# Altium PCB RelayBoard.PcbDoc
Units mm, origin at the board's own origin, x right, y up, seen from the top; angles counter-clockwise.
Board outline 158 x 77 mm, 2 copper layers (Top Layer, Bottom Layer), stack 1.571 mm thick; 98 components, 76 nets, 303 pads, 50 vias.
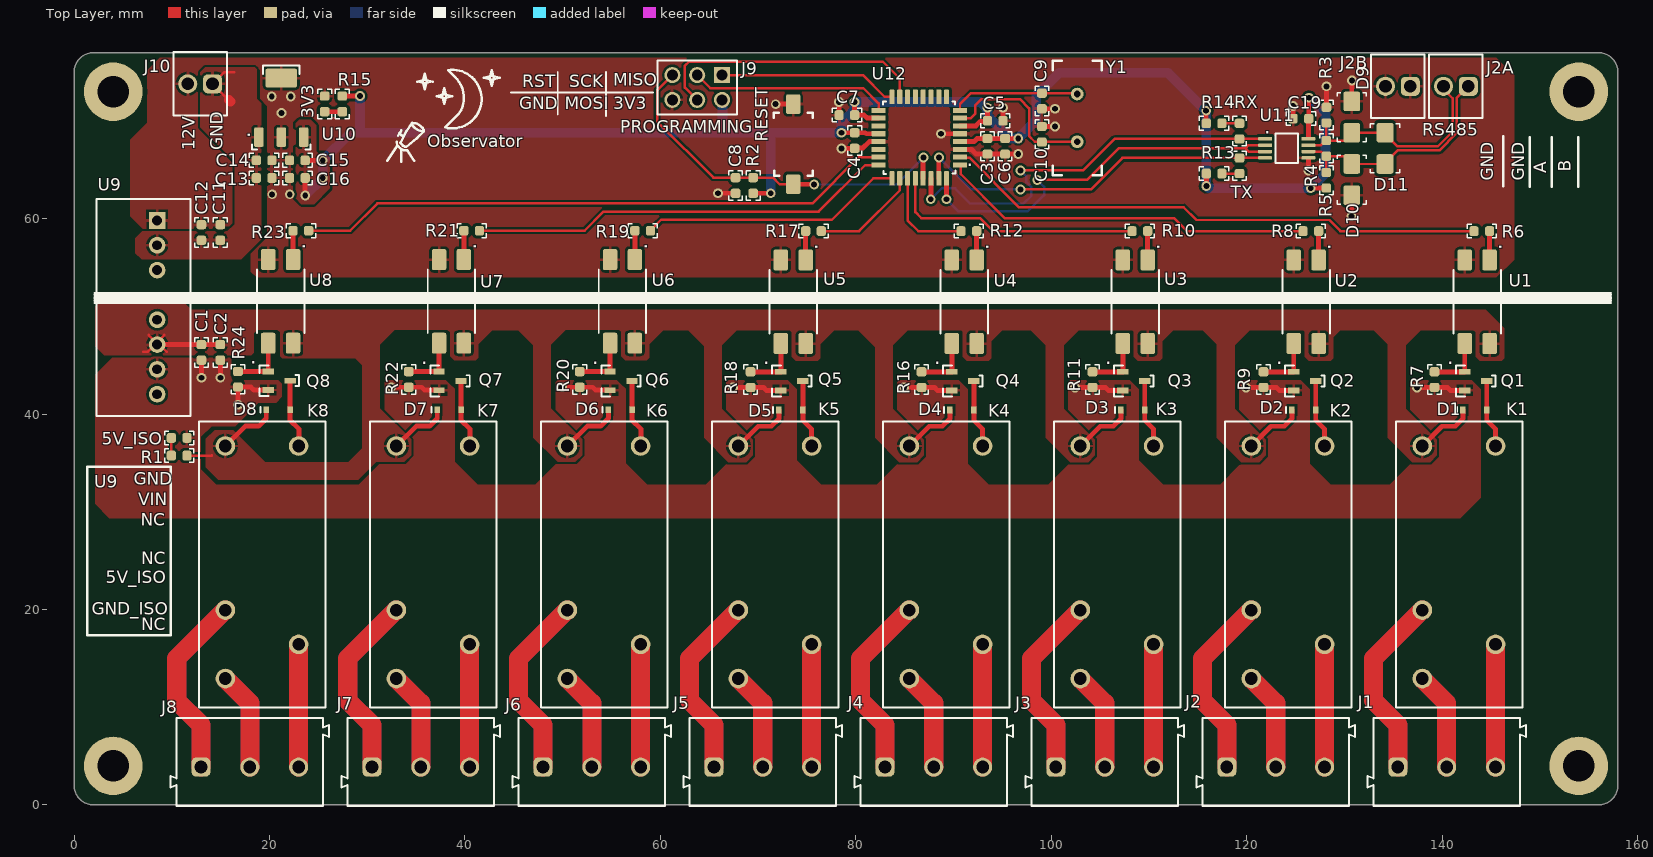
[diagram p0: Top Layer view]
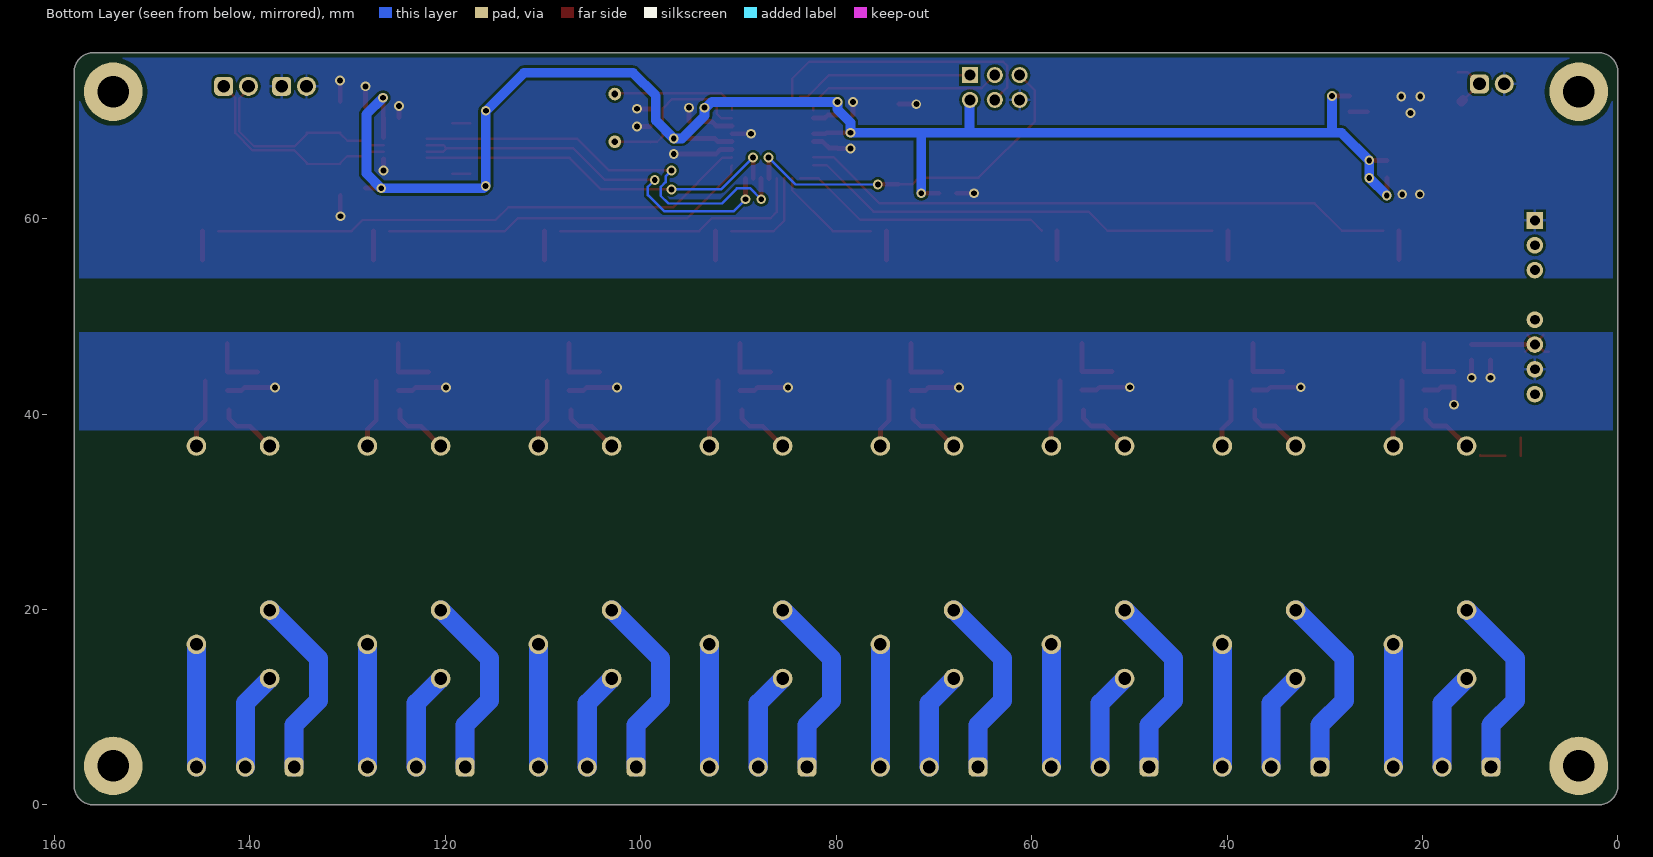
[diagram p1: Bottom Layer view, seen from below]
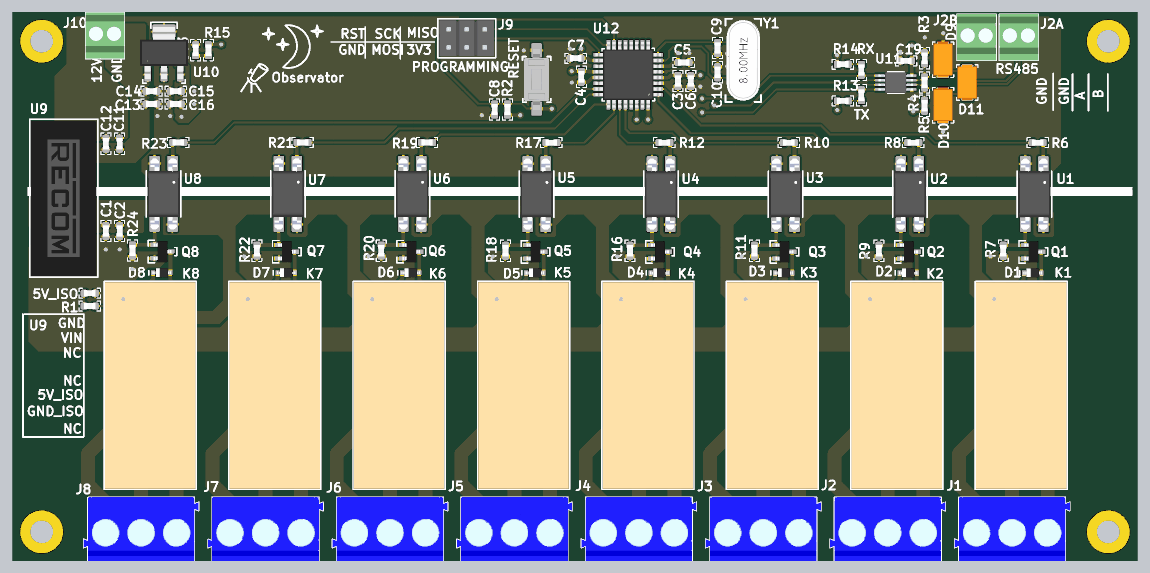
[diagram p2: 3D render of the assembled board from above, using the file's embedded part models]

## Layer stack, top to bottom
Top Solder: solder mask 0.0102, Solder Resist, Dk 3.5
Top Layer: signal copper 0.0356
Dielectric 1: dielectric 1.5, FR-4, Dk 4.8
Bottom Layer: signal copper 0.0356
Bottom Solder: solder mask 0.0102, Solder Resist, Dk 3.5

## Board outline
0,2 0,75 cw(c2,75) 2,77 156,77 cw(c156,75) 158,75 158,2 cw(c156,2) 156,0 2,0 cw(c2,2)

## Design rules (kind name [scope] priority, off if disabled: settings)
BoardOutlineClearance [All] p1: gap=0.5 ignorepadtopadclearanceinfootprint=FALSE
Clearance Clearance_PH [InNetClass('PHASE')] p1: gap=3 ignorepadtopadclearanceinfootprint=FALSE
Clearance Clearance_MH [InPadClass('MH')] p2: gap=0.5 ignorepadtopadclearanceinfootprint=FALSE
Clearance [All] p3: gap=0.25 ignorepadtopadclearanceinfootprint=FALSE except(0.15: Arc-Arc Arc-Track Arc-SMDPad Track-Track Track-SMDPad SMDPad-SMDPad SMDPad-THPad SMDPad-Via SMDPad-Hole; 0.3: SMDPad-Fill SMDPad-Poly SMDPad-Region)
HoleSize [All] p1: absolutevalues=TRUE maxlimit=3.2 minlimit=0.025 maxpercent=80.000 minpercent=20.000
HoleToHoleClearance [All] p1: gap=0.75 allowstackedmicrovias=TRUE
MinimumSolderMaskSliver [All] p1: minsoldermaskwidth=0.076
PolygonConnect [All] p1: thpad.connectstyle=Relief thpad.reliefconductorwidth=0.3 thpad.reliefentries=4 thpad.polygonreliefangle="90 Angle" thpad.airgapwidth=0.254 smdpad.connectstyle=Relief smdpad.reliefconductorwidth=0.3 smdpad.reliefentries=4 smdpad.polygonreliefangle="90 Angle" smdpad.airgapwidth=0.254 via.connectstyle=Direct via.reliefconductorwidth=0.3 via.reliefentries=4 via.polygonreliefangle="90 Angle" via.airgapwidth=0.254
RoutingVias [All] p1: holewidth=3 width=7 viastyle="Through Hole" minholewidth=0.5 minwidth=1 maxholewidth=0.711 maxwidth=1.27
SilkToSilkClearance [All] p1: silktosilkclearance=0.01
SilkToSolderMaskClearance [IsPad] p1: minsilkscreentomaskgap=0.01 clearancetoexposedcopper=FALSE
SolderMaskExpansion [All] p1: expansion=0.102 istentingtop=FALSE
Width [All] p1: maxlimit=1.95 minlimit=0.254 preferedwidth=0.5 minimp=50.000000 maximp=50.000000 favimp=50.000000
25 further rules are at their usual default settings.

## Classes and differential pairs
net class PHASE: PH1_1 PH1_2 PH1_3 PH2_1 PH2_2 PH2_3 PH3_1 PH3_2 PH3_3 PH4_1 PH4_2 PH4_3 PH5_1 PH5_2 PH5_3 PH6_1 PH6_2 PH6_3 PH7_1 PH7_2 PH7_3 PH8_1 PH8_2 PH8_3
pad class MH: Free-MH

## Components (designator, comment, footprint, x,y, rotation, side; value= is the part's Value field where it differs from the comment)
3V3 "TBD" CASE0603 25.643,71.75 r90 top
5V_ISO "TBD" CASE0603 10.752,37.565 r0 top
C1 "100nF" CASE0603 13.024,46.321 r90 top
C2 "10uF" CASE0603 14.964,46.321 r90 top
C3 "100nF" CASE0603 93.476,67.412 r90 top
C4 "100nF" CASE0603 79.888,67.999 r90 top
C5 "100nF" CASE0603 94.276,70.019 r180 top
C6 "10uF" CASE0603 95.28,67.412 r90 top
C7 "100nF" CASE0603 79.088,70.604 r0 top
C8 "100nF" CASE0603 67.696,63.4 r270 top
C9 "100nF" CASE0603 99.053,72.048 r90 top
C10 "100nF" CASE0603 99.053,68.643 r270 top
C11 "10uF" CASE0603 14.964,58.595 r270 top
C12 "100nF" CASE0603 13.024,58.595 r270 top
C13 "10uF" CASE0603 19.445,64.17 r180 top
C14 "100nF" CASE0603 19.445,65.975 r180 top
C15 "100nF" CASE0603 22.849,65.975 r0 top
C16 "10uF" CASE0603 22.849,64.17 r0 top
C19 "100nF" CASE0603 125.559,70.241 r180 top
D1 "1N4148" SOD-323 143.361,40.427 r0 top
D2 "1N4148" SOD-323 125.861,40.427 r0 top
D3 "1N4148" SOD-323 108.361,40.427 r0 top
D4 "1N4148" SOD-323 90.861,40.427 r0 top
D5 "1N4148" SOD-323 73.361,40.427 r0 top
D6 "1N4148" SOD-323 55.88,40.446 r0 top
D7 "1N4148" SOD-323 38.38,40.446 r0 top
D8 "1N4148" SOD-323 20.88,40.446 r0 top
D9 "SMAJ5.0CA" SMA 130.767,70.4 r270 top
D10 "SMAJ5.0CA" SMA 130.767,64 r270 top
D11 "SMAJ5.0CA" SMA 134.172,67.2 r90 top
J1 "691101710003" 691101710003 135.481,3.876 r0 top
J2 "691101710003" 691101710003 117.981,3.876 r0 top
J2A "691210910002" 691210910002 141.419,73.551 r180 top
J2B "691210910002" 691210910002 135.485,73.551 r180 top
J3 "691101710003" 691101710003 100.481,3.876 r0 top
J4 "691101710003" 691101710003 82.981,3.876 r0 top
J5 "691101710003" 691101710003 65.481,3.876 r0 top
J6 "691101710003" 691101710003 47.981,3.876 r0 top
J7 "691101710003" 691101710003 30.481,3.876 r0 top
J8 "691101710003" 691101710003 12.981,3.876 r0 top
J9 "PH2-06-UA" Header_2x3_2.54_Male 66.313,74.7 r180 top
J10 "691210910002" 691210910002 12.9,73.8 r180 top
K1 "RT174005" RELAY-SPDT_3.5mm 137.981,36.738 r0 top
K2 "RT174005" RELAY-SPDT_3.5mm 120.481,36.738 r0 top
K3 "RT174005" RELAY-SPDT_3.5mm 102.981,36.738 r0 top
K4 "RT174005" RELAY-SPDT_3.5mm 85.481,36.738 r0 top
K5 "RT174005" RELAY-SPDT_3.5mm 67.981,36.738 r0 top
K6 "RT174005" RELAY-SPDT_3.5mm 50.481,36.738 r0 top
K7 "RT174005" RELAY-SPDT_3.5mm 32.981,36.738 r0 top
K8 "RT174005" RELAY-SPDT_3.5mm 15.481,36.738 r0 top
Q1 "2N7002" SOT23-3 145.471,42.752 r0 top
Q2 "2N7002" SOT23-3 127.971,42.752 r0 top
Q3 "2N7002" SOT23-3 110.471,42.752 r0 top
Q4 "2N7002" SOT23-3 92.971,42.752 r0 top
Q5 "2N7002" SOT23-3 75.471,42.752 r0 top
Q6 "2N7002" SOT23-3 57.99,42.771 r0 top
Q7 "2N7002" SOT23-3 40.49,42.771 r0 top
Q8 "2N7002" SOT23-3 23.008,42.789 r0 top
R1 "10K" CASE0603 10.752,35.761 r180 top
R2 "10K" CASE0603 69.5,63.4 r90 top
R3 "10K" CASE0603 128.168,70.607 r270 top
R4 "10K" CASE0603 128.163,67.202 r270 top
R5 "10K" CASE0603 128.163,63.934 r270 top
R6 "10K" CASE0603 144.071,58.735 r0 top
R7 "10K" CASE0603 139.232,43.531 r90 top
R8 "10K" CASE0603 126.571,58.735 r0 top
R9 "10K" CASE0603 121.732,43.531 r90 top
R10 "10K" CASE0603 109.071,58.735 r0 top
R11 "10K" CASE0603 104.232,43.531 r90 top
R12 "10K" CASE0603 91.571,58.735 r0 top
R13 "10K" CASE0603 116.672,64.621 r0 top
R14 "10K" CASE0603 116.672,69.761 r0 top
R15 "10K" CASE0603 27.447,71.75 r270 top
R16 "10K" CASE0603 86.732,43.531 r90 top
R17 "10K" CASE0603 75.671,58.735 r180 top
R18 "10K" CASE0603 69.232,43.531 r90 top
R19 "10K" CASE0603 58.19,58.772 r180 top
R20 "10K" CASE0603 51.751,43.55 r90 top
R21 "10K" CASE0603 40.69,58.772 r180 top
R22 "10K" CASE0603 34.251,43.549 r90 top
R23 "10K" CASE0603 23.207,58.772 r180 top
R24 "10K" CASE0603 16.769,43.567 r90 top
RESET "PTS636 SL43 SMTR LFS" "SMT Button" 73.601,67.626 r90 top
RX "TBD" CASE0603 119.276,68.961 r270 top
TX "TBD" CASE0603 119.276,65.421 r90 top
U1 "PC817XNNIP1B" SMD-4 143.601,51.498 r270 top
U2 "PC817XNNIP1B" SMD-4 126.101,51.498 r270 top
U3 "PC817XNNIP1B" SMD-4 108.601,51.498 r270 top
U4 "PC817XNNIP1B" SMD-4 91.101,51.498 r270 top
U5 "PC817XNNIP1B" SMD-4 73.601,51.498 r270 top
U6 "PC817XNNIP1B" SMD-4 56.12,51.535 r270 top
U7 "PC817XNNIP1B" SMD-4 38.62,51.535 r270 top
U8 "PC817XNNIP1B" SMD-4 21.137,51.535 r270 top
U9 "RS3E-1205S/H3" SIP-8 8.495,59.821 r270 top
U10 "MCP1703T-3302E/MB" SOT-223-3 21.2,71.365 r90 top
U11 "MAX3471CUA+" TSSOP-8 124.108,67.2 r0 top
U12 "ATMEGA328P-AU" TQFP-32 86.498,68.296 r180 top
Y1 "AS-16.000-18" HC-49/US 102.661,70.317 r90 top

## Footprints (in the part's own frame and the unit in brackets; to place one, negate y for a bottom-side part, rotate by r counter-clockwise, add the part's x,y. Pads: shape width x height; smd on the part's side, far side on the other; paste and mask are expansions set on the pad)
691101710003 [mm] "5,00mm - modular - blue - Horizontal entry with pressure clamp - 12,6mm height - 03p"
  rrect50% 1.95x1.95 hole 1.3: 1(0,0)
  round 1.95 hole 1.3: 2(5,0) 3(10,0)
  silkscreen extent -3.1,-4 13.1,5, body extent -3.1,-4 13.1,5, height 12.65
691210910002 [mm] "2,54mm - modular - green - Horizontal wire entry - Cage clamp - 0,8mm2 wires - 02p"
  rrect50% 1.95x1.95 hole 1.3: 1(-1.27,0)
  round 1.95 hole 1.3: 2(1.27,0)
  silkscreen extent -2.74,-3.25 2.74,3.25, body extent -2.74,-3.25 2.74,3.25, height 8.55
CASE0603 [mm]
  rrect50% 0.95x1 smd: 1(-0.8,0) 2(0.8,0)
  silkscreen extent -1.5,-0.7 1.5,0.7, body extent -0.8,-0.43 0.8,0.43, height 0.85
HC-49/US [mm] "Crystal, Thru-Hole; 2 Leads"
  round 1.3 hole 0.7: 1(-2.44,0) 2(2.44,0)
  silkscreen extent -5.85,-2.5 5.85,2.5, body extent -5.67,-2.33 5.67,2.33, height 3.61
Header_2x3_2.54_Male [mm]
  rect 1.65x1.65 hole 1.1: 1(0,0)
  round 1.65 hole 1.1: 2(0,2.54) 3(2.54,0) 4(2.54,2.54) 5(5.08,0) 6(5.08,2.54)
  silkscreen extent -1.52,-1.48 6.6,4.02, body extent -1.27,-1.23 6.35,3.77, height 9.01
RELAY-SPDT_3.5mm [mm]
  round 2.007 hole 1.3: 11(7.5,-20.3) 12(0,-16.8) 14(0,-23.8) A1(0,0) A2(7.5,0)
  silkscreen extent -2.7,-26.77 10.26,2.49, body extent -2.57,-26.64 10.13,2.36, height 15.7
SIP-8 [mm]
  rect 1.7x1.7 hole 1: 1(0,0)
  round 1.7 hole 1: 2(2.54,0) 3(5.08,0) 5(10.16,0) 6(12.7,0) 7(15.24,0) 8(17.78,0)
  silkscreen extent -2.2,-6.2 20,3.4, body extent -2,-6 19.8,3.2, height 11.1
SMA [mm] "Resistor CASE 1206"
  rrect25% 2x1.72 smd mask+0.102: 1(-1.6,0) 2(1.6,0)
  silkscreen extent -2.5,-1.5 2.5,1.5, body extent -2.54,-1.35 2.51,1.35, height 2.17
SMD-4 [mm]
  rrect25% 2.15x1.48 smd: 1(-4.28,1.27) 2(-4.28,-1.27) 3(4.28,-1.27) 4(4.28,1.27)
  silkscreen extent -3.25,-2.43 3.25,2.43, body extent -5,-2.29 5,2.29, height 4
"SMT Button" [mm] "Button"
  rrect25% 2x1.5 smd: 1(-4.1,0) 2(4.1,0)
  silkscreen extent -3.21,-2 3.21,1.98, body extent -4.3,-1.75 4.3,1.75, height 4.3
SOD-323 [mm]
  rect 0.56x0.69 smd: A(1.22,0) K(-1.22,0)
  silkscreen extent -1.82,-0.3 -1.82,0.3, body extent -1.3,-0.67 1.3,0.68, height 1.1
SOT23-3 [mm]
  rect 1.15x0.6 smd: 1(-3.14,1.579) 2(-3.14,-0.321) 3(-0.89,0.629)
  silkscreen extent -4.03,-0.95 0,2.21, body extent -3.27,-0.87 -0.77,2.13, height 1.1
SOT-223-3 [mm]
  rrect25% 1.97x0.95 smd: 1(-3.025,2.3) 2(-3.025,0) 3(-3.025,-2.3)
  rrect25% 1.97x3.25 smd: 4(3.025,0)
  silkscreen extent -4.26,-3 4.3,3, body extent -3.65,-3.35 3.65,3.35, height 1.8
TQFP-32 [mm]
  rrect25% 1.47x0.52 smd: 1(-4.17,2.8) 2(-4.17,2) 3(-4.17,1.2) 4(-4.17,0.4) 5(-4.17,-0.4) 6(-4.17,-1.2) 7(-4.17,-2) 8(-4.17,-2.8) 17(4.17,-2.8) 18(4.17,-2) 19(4.17,-1.2) 20(4.17,-0.4) 21(4.17,0.4) 22(4.17,1.2) 23(4.17,2) 24(4.17,2.8)
  rrect25% 0.52x1.47 smd: 9(-2.8,-4.17) 10(-2,-4.17) 11(-1.2,-4.17) 12(-0.4,-4.17) 13(0.4,-4.17) 14(1.2,-4.17) 15(2,-4.17) 16(2.8,-4.17) 25(2.8,4.17) 26(2,4.17) 27(1.2,4.17) 28(0.4,4.17) 29(-0.4,4.17) 30(-1.2,4.17) 31(-2,4.17) 32(-2.8,4.17)
  silkscreen extent -3.7,-3.7 3.7,3.7, body extent -4.62,-4.62 4.62,4.62, height 1.2
TSSOP-8 [mm]
  rrect50% 1.425x0.36 smd: 1(-2.212,0.975) 2(-2.212,0.325) 3(-2.212,-0.325) 4(-2.212,-0.975) 5(2.212,-0.975) 6(2.212,-0.325) 7(2.212,0.325) 8(2.212,0.975)
  silkscreen extent -1.15,-1.5 1.15,1.5, body extent -2.45,-1.5 2.45,1.5, height 1.1

## Part data
3V3 5V_ISO RX TX: library part LED, "Typical INFRARED GaAs LED"
C1 C3 C4 C5 C7 C8 C9 C10 C12 C14 C15 C19: library part Capacitor_100nF, "CAP CER 100nF 5% 25V X7R 0603", MFR=KEMET, MFR PN=C0603C104J3RAC, Datasheet=https://eu.mouser.com/ProductDetail/KEMET/C0603C104J3RAC?qs=zlI8QACJnq%252BcGF637t1xBQ%3D%3D, Supplier=Mouser, Supplier PN=80-C0603C104J3RAC
C2 C6 C11 C13 C16: library part Capacitor_10uF, "CAP CER 10uF 20% 25V X5R 0603", MFR=TDK, MFR PN=C1608X5R1E106M080AC, Datasheet=https://eu.mouser.com/ProductDetail/TDK/C1608X5R1E106M080AC?qs=dfay7wIA1uGdHfZTkqsICA%3D%3D, Supplier=Mouser, Supplier PN=810-C1608X5R1E106M
D1 D2 D3 D4 D5 D6 D7 D8: library part "Diode 1N4148", "High Conductance Fast Diode", MFR="Micro Commercial Components (MCC)", MFR PN=1N4148WX-TP, ComponentLink1Description="Manufacturer Link", ComponentLink1URL=http://www.fairchildsemi.com/, ComponentLink2Description=Datasheet, ComponentLink2URL=http://www.fairchildsemi.com/ds/1N%2F1N4148.pdf, Datasheet=https://eu.mouser.com/ProductDetail/Micro-Commercial-Components-MCC/1N4148WX-TP?qs=Vo7e0yZOYdH7fKyVBspYOg%3D%3D, Supplier=Mouser, Supplier PN=833-1N4148WX-TP
D9 D10 D11: library part Diode_SMAJ5.0CA, "9.2V Clamp 43.5A Ipp Tvs Diode Surface Mount DO-214AC (SMA)", MFR="Good-Ark Semiconductor", Datasheet=https://www.digikey.ro/en/products/detail/good-ark-semiconductor/SMAJ5-0CA/18649098, MFR PN=SMAJ5.0CA, Supplier="Digi Key", Supplier PN=4786-SMAJ5.0CACT-ND
J1 J2 J3 J4 J5 J6 J7 J8: library part Connector_691101710003, "TERM BLOCK 3P HORIZON 5MM PCB", MFR=Wurth, Datasheet=https://www.digikey.ro/en/products/detail/w%C3%BCrth-elektronik/691210910002/10668428?s=N4IgTCBcDaIGwE4CMYkAZlqxAugXyA, MFR PN=691101710003, Supplier="Digi Key", Supplier PN=732-2027-ND
J2A J2B J10: library part Connector_691210910002, "TERM BLOCK 2P HORIZON 2.54MM PCB", MFR=Wurth, Datasheet=https://www.digikey.ro/en/products/detail/w%C3%BCrth-elektronik/691210910002/10668428?s=N4IgTCBcDaIGwE4CMYkAZlqxAugXyA, MFR PN=691210910002, Supplier="Digi Key", Supplier PN=732-691210910002-ND
J9: library part Connector_PH2-06-UA, "Connector Header Through Hole 6 position 0.100\" (2.54mm)", MFR="Adam Tech", Datasheet=https://www.digikey.ro/en/products/detail/adam-tech/PH2-06-UA/9830396, MFR PN=PH2-06-UA, Supplier="Digi Key", Supplier PN=2057-PH2-06-UA-ND
K1 K2 K3 K4 K5 K6 K7 K8: library part Relay_RT174005, "RELAY GEN PURPOSE SPDT 10A 5V", MFR=TE
Q1 Q2 Q3 Q4 Q5 Q6 Q7 Q8: library part Transistor_NMOS, "MOSFET N-CH 60V 280MA SOT23-3", MFR=Microchip, MFR PN=2N7002-G, Datasheetr=https://eu.mouser.com/ProductDetail/Microchip-Technology/2N7002-G?qs=D%2FHwGy7fPj%2F0m3YgJ%252BOEvg%3D%3D&gad_source=1&gclid=CjwKCAiA-vOsBhAAEiwAIWR0TUe7q_QostOicZHu1AHXgQXTk64doIjIByY-NhPhM9vjgvrvT5qG4BoC-HkQAvD_BwE&_gl=1*1hvi63b*_ga*MjAyNjQwOTA4MS4xNzA0NjI4Mjkx*_ga_15W4STQT4T*MTcwNDgyMjg3Ni4yLjEuMTcwNDgyMjg3Ni42MC4wLjA., Supplier=689-2N7002-G, Supplier PN=689-2N7002-G
R1 R2 R3 R4 R5 R6 R7 R8 R9 R10 R11 R12 R13 R14 R15 R16 R17 R18 R19 R20 R21 R22 R23 R24: library part Resistor_10K_0603, "RES 10K 1% 1/10W 0603", MFR=YAGEO, MFR PN=RC0603FR-0710KL, Datasheet=https://eu.mouser.com/ProductDetail/YAGEO/RC0603FR-0710KL?qs=grNVn54RoB%252B3GtjbJj3wJQ%3D%3D, Supplier=Mouser, Supplier PN=603-RC0603FR-0710KL
RESET: library part "Button_PTS636 SL43 SMTR LFS", "9.2V Clamp 43.5A Ipp Tvs Diode Surface Mount DO-214AC (SMA)", MFR=C&K, Datasheet=https://www.digikey.ro/en/products/detail/c-k/PTS636-SL43-SMTR-LFS/10071722, MFR PN="PTS636 SL43 SMTR LFS", Supplier="Digi Key", Supplier PN=CKN12309-1-ND
U1 U2 U3 U4 U5 U6 U7 U8: library part Optocoupler_PC817, "4-Pin Phototransistor Optocoupler", MFR="Sharp Microelectronics", Datasheet=https://eu.mouser.com/ProductDetail/Sharp-Microelectronics/PC817XNNIP1B?qs=rrS6PyfT74dJvnx7366b6Q%3D%3D, MFR PN=PC817XNNIP1B, Supplier=852-PC817XNNIP1B, Supplier PN=Mouser
U9: library part Module_RS3E-1205S/H3, "DC DC CONVERTER 9-18V IN 5V OUT 600mA 3W"
U10: "IC REG LINEAR 3.3V 250MA SOT89-3", MFR=Microchip, Datasheet=https://www.digikey.ro/en/products/detail/microchip-technology/MCP1703T-3302E-MB/1635604, MFR PN=MCP1703T-3302E/MB, Supplier="Digi Key", Supplier PN=MCP1703T-3302E/MBCT-ND
U11: library part IC_MAX3471, "IC TRANSCEIVER HALF 1/1 8UMAX", MFR="Analog Devices", Datasheet=https://www.digikey.com/en/products/detail/analog-devices-inc-maxim-integrated/max3471cua/1702211, MFR PN=MAX3471CUA+, Supplier="Digi Key", Supplier PN=MAX3471CUA+-ND
U12: library part IC_ATMEGA328, "AVR AVR® ATmega Microcontroller IC 8-Bit 20MHz 32KB (16K x 16) FLASH 32-TQFP (7x7)", MFR PN=Microchip, Datasheet=https://www.digikey.com/en/products/detail/microchip-technology/ATMEGA328P-AU/1832260, MFR=ATMEGA328P-AU, Supplier="Digi Key", Supplier PN=ATMEGA328P-AU-ND
Y1: library part Crystal_AS-16.000-18, "16 MHz ±30ppm Crystal 18pF 40 Ohms HC-49/US", MFR="Raltron Electronics", Datasheet=https://www.digikey.ro/en/products/detail/raltron-electronics/AS-16-000-18/10271769, MFR PN=AS-16.000-18, Supplier="Digi Key", Supplier PN=2151-AS-16.000-18-ND

## Free pads (board coordinates)
  round 6 hole 3.2: MH(4,4) MH(4,73) MH(154,4) MH(154,73)

## Via types
v1: diameter 1, hole 0.6, Top Layer to Bottom Layer, tented both sides, 50 vias

## Nets (pads, with @x,y where several pads share a name; then routed paths per layer and width w, separated by ;. In a path a pad name is that pad's centre, name@x,y a point inside that pad or via, vN(x,y) a via of type N, cw(c..) or ccw(c..) an arc to the next point about the centre after c; other vN are vias at no path point)
3V3: C3.2 C4.2 C5.2 C6.2 C7.2 C15.2 C16.2 C19.1 J9.2 R2.1 R5.2 R13.1 R14.1 R15.1 U10.3 U11.8 U12.4 U12.6 U12.18 U12.20 | length 182.3
  Top Layer w0.5: v1(23.649,62.37) C16.2 ; C15.2 v1(25.449,65.975) ; R15.1 v1(29.247,72.55) ; R2.1 v1(71.3,62.6) ; v1@78.54,68.799 C4.2 79.891,68.796 80.968,68.796 81.068,68.696 U12.20 ; v1@79.888,71.951 C7.2 80.861,70.604 81.158,70.306 82.318,70.306 U12.18 ; U12.4 92.098,67.896 92.413,68.212 C3.2 C6.2 v1@96.628,68.212 ; U12.6 92.298,69.496 92.769,69.967 93.424,69.967 C5.2 v1@93.476,71.367 ; R14.1@115.863,69.883 v1(115.863,71.044) ; v1(115.881,63.338) R13.1@115.881,64.499 ; C19.1@126.339,70.222 C19.1@126.352,70.234 ; U11.8@126.352,68.314 C19.1@126.352,70.234 ; C19.1@126.352,70.341 C19.1@126.352,70.234 ; v1@126.359,72.383 C19.1 C19.1@126.352,70.234 ; v1@126.573,63.134 R5.2
  Bottom Layer w1: v1(23.649,62.37) v1(25.449,64.17) v1(25.449,65.975) 28.266,68.792 29.268,68.792 ; v1(29.247,72.55) 29.268,72.529 29.268,68.792 ; J9.2 66.368,72.104 66.368,68.792 ; v1(71.3,62.6) 71.3,68.56 71.068,68.792 ; v1(126.382,72.383) 128.068,70.697 128.068,64.614 v1(126.573,63.118) 116.101,63.118 115.872,63.347 115.872,71.035 v1(115.863,71.044) 111.975,74.932 100.805,74.932 98.468,72.596 98.468,70.059 v1(96.628,68.219) 95.781,68.219 93.469,70.531 v1(93.469,71.367) 93.333,71.367 92.749,71.951 v1(79.88,71.951) 79.88,71.199 78.54,69.859 v1(78.54,68.792) 71.068,68.792 ; 29.268,68.792 66.368,68.792 ; 66.368,68.792 71.068,68.792
5V_ISO: C1.2 C2.2 D1.K D2.K D3.K D4.K D5.K D6.K D7.K D8.K K1.A1 K2.A1 K3.A1 K4.A1 K5.A1 K6.A1 K7.A1 K8.A1 R1.1 U1.4 U2.4 U3.4 U4.4 U5.4 U6.4 U7.4 U8.4 U9.6 | length 63.8
  Top Layer w0.254: 7.069,46.367 7.508,46.367 8.261,47.121 U9.6 ; 7.624,48.108 U9.6@8.378,47.354 ; U9.6@8.495,47.354 9.248,48.108 ; U9.6@8.728,47.121 9.482,46.367 ; R1.1 14.062,35.761 14.069,35.767
  Top Layer w0.5: U9.6 C1.2 C2.2 ; K8.A1 17.522,38.778 18.885,38.778 19.66,39.553 D8.K ; K7.A1 35.022,38.778 36.385,38.778 37.16,39.553 D7.K ; K6.A1 52.522,38.778 53.885,38.778 54.69,39.583 D6.K@54.69,40.416 ; K5.A1@67.962,36.719 70.003,38.759 71.366,38.759 72.141,39.534 D5.K ; K4.A1@85.462,36.719 87.503,38.759 88.866,38.759 89.641,39.534 D4.K ; K3.A1@102.962,36.719 105.003,38.759 106.366,38.759 107.141,39.534 D3.K ; K2.A1@120.462,36.719 122.503,38.759 123.866,38.759 124.641,39.534 D2.K ; K1.A1@137.962,36.719 140.003,38.759 141.366,38.759 142.141,39.534 D1.K
12V: C11.2 C12.2 C13.2 C14.2 J10.1 U9.2 U10.1 | length 5.3
  Top Layer w0.254: 15.845,72.149 15.821,72.149 J10.1 15.374,75.004 16.386,75.004
  Top Layer w1: 15.845,72.149 15.994,72 16,72
A1: D1.A K1.A2 Q1.3 | length 7
  Top Layer w0.5: Q1.3 D1.A 144.581,39.371 145.481,38.471 K1.A2
A2: D2.A K2.A2 Q2.3 | length 7
  Top Layer w0.5: Q2.3 D2.A 127.081,39.371 127.981,38.471 K2.A2
A3: D3.A K3.A2 Q3.3 | length 7
  Top Layer w0.5: Q3.3 D3.A 109.581,39.371 110.481,38.471 K3.A2
A4: D4.A K4.A2 Q4.3 | length 7
  Top Layer w0.5: Q4.3 D4.A 92.081,39.371 92.981,38.471 K4.A2
A5: D5.A K5.A2 Q5.3 | length 7
  Top Layer w0.5: Q5.3 D5.A 74.581,39.371 75.481,38.471 K5.A2
A6: D6.A K6.A2 Q6.3 | length 7
  Top Layer w0.5: Q6.3 D6.A 57.1,39.39 58,38.49 K6.A2@58,36.756
A7: D7.A K7.A2 Q7.3 | length 7
  Top Layer w0.5: Q7.3 D7.A 39.6,39.39 40.5,38.49 K7.A2@40.5,36.756
A8: D8.A K8.A2 Q8.3 | length 7
  Top Layer w0.5: Q8.3 22.109,43.409 22.109,40.455 D8.A 22.1,39.39 23,38.49 K8.A2@23,36.756
B1: R6.1 U12.2 | length 55.7
  Top Layer w0.254: U12.2 90.702,66.262 91.622,66.262 96.718,61.167 113.569,61.167 114.869,59.867 128.469,59.867 129.6,58.735 R6.1
B2: R8.1 U12.1 | length 38.4
  Top Layer w0.254: U12.1 90.668,65.441 90.746,65.363 90.746,64.562 95.24,60.067 112.569,60.067 113.9,58.735 R8.1
B3: R10.1 U12.28 | length 26.4
  Top Layer w0.254: U12.28 86.098,60.668 86.699,60.067 92.701,60.067 94.033,58.735 R10.1
B4: R12.1 U12.27 | length 10.2
  Top Layer w0.254: U12.27 85.298,59.831 86.394,58.735 R12.1
B5: R17.1 U12.26 | length 11
  Top Layer w0.254: R17.1 80.337,58.735 84.498,62.897 U12.26
B6: R19.1 U12.25 | length 26.9
  Top Layer w0.254: R19.1 58.99,58.797 60.086,59.893 77.561,59.893 81.793,64.126 U12.25
B7: R21.1 U12.24 | length 43.6
  Top Layer w0.254: R21.1 52.245,58.772 54.192,60.72 76.192,60.72 80.968,65.496 U12.24
B8: R23.1 U12.23 | length 61.4
  Top Layer w0.254: R23.1 28.245,58.772 31.039,61.567 75.569,61.567 80.298,66.296 U12.23
DIR: U11.2 U11.3 U12.32 | length 42.1
  Top Layer w0.254: v1(98.568,63.971) 103.665,63.971 106.89,67.196 119.879,67.196 ; U11.3 120.2,66.875 119.879,67.196 ; U11.2 120.208,67.525 119.879,67.196
  Top Layer w0.5: v1@89.298,61.985 U12.32
  Bottom Layer w0.254: v1(89.275,61.985) 90.482,60.777 97.628,60.777 99.268,62.418 99.268,63.271 v1(98.568,63.971)
GND: 3V3.2 C3.1 C4.1 C5.1 C6.1 C7.1 C8.2 C9.1 C10.1 C11.1 C12.1 C13.1 C14.1 C15.1 C16.1 C19.2 D9.1 D10.2 J2B.1 J2B.2 J9.6 J10.2 R3.1 RESET.2 U1.2 U2.2 U3.2 U4.2 U5.2 U6.2 U7.2 U8.2 U9.1 U10.2 U10.4 U11.5 U12.3 U12.5 U12.21 | length 29.9
  Top Layer w0.5: v1(65.896,62.6) C8.2 ; v1(71.801,71.726) RESET.2 ; C7.1 v1@78.288,71.951 ; v1@78.54,67.199 C4.1 79.932,67.244 80.74,67.244 81.383,67.886 82.318,67.886 U12.21 ; v1@88.72,68.696 U12.5 ; U12.3 90.678,67.086 91.85,67.086 92.324,66.612 C3.1 C6.1 v1@96.628,66.612 ; C5.1 v1@95.076,71.367 ; C10.1 v1@100.401,69.443 ; C9.1 v1@100.401,71.248 ; C19.2@124.75,70.363 v1(124.75,71.525) ; v1(126.329,64.942) 126.329,66.103 U11.5@126.338,66.112 ; R3.1 v1@128.168,73.548 ; v1@130.767,60.259 D10.2 ; D9.1 v1@130.767,74.141
  other v1: 130.744,60.259 20.268,62.496 22.068,62.496 96.628,66.619 78.54,67.192 88.72,68.689 100.401,69.451 21.225,70.824 100.401,71.255 95.069,71.367 78.28,71.951 20.228,72.496 22.168,72.496 128.192,73.548 130.791,74.141
GND_ISO: 5V_ISO.2 C1.1 C2.1 Q1.2 Q2.2 Q3.2 Q4.2 Q5.2 Q6.2 Q7.2 Q8.2 R7.1 R9.1 R11.1 R16.1 R18.1 R20.1 R22.1 R24.1 U9.7 | length 43.8
  Top Layer w0.5: v1(13.024,43.721) C1.1 ; v1(14.964,43.721) C2.1 ; v1(16.769,40.967) R24.1 18.09,42.767 18.389,42.468 Q8.2 ; v1(32.451,42.749) R22.1 35.572,42.749 35.871,42.45 Q7.2 ; v1(49.951,42.749) R20.1 53.072,42.749 53.371,42.45 Q6.2 ; v1(67.432,42.731) R18.1 70.553,42.731 70.853,42.431 Q5.2 ; v1(84.932,42.731) R16.1 88.053,42.731 88.353,42.431 Q4.2 ; v1(102.432,42.731) R11.1 105.553,42.731 105.853,42.431 Q3.2 ; v1(119.932,42.731) R9.1 123.053,42.731 123.353,42.431 Q2.2 ; v1(137.432,42.731) R7.1 140.553,42.731 140.853,42.431 Q1.2
Net3V3_1: 3V3.1 R15.2 | length 1.8
  Top Layer w0.5: 3V3.1 R15.2
Net5V_ISO_1: 5V_ISO.1 R1.2 | length 1.8
  Top Layer w0.254: R1.2 5V_ISO.1
NetC9_2: C9.2 U12.8 Y1.2 | length 13.1
  Top Layer w0.254: U12.8 90.668,71.737 91.779,72.848 102.57,72.848 Y1.2
NetC10_2: C10.2 U12.7 Y1.1 | length 16.8
  Top Layer w0.254: U12.7 91.784,70.296 92.21,70.722 92.21,71.594 92.86,72.244 96.788,72.244 97.748,71.284 97.748,68.453 98.321,67.88 99.017,67.88 C10.2 99.07,67.86 102.644,67.86 Y1.1
NetD9_2: D9.2 D11.2 J2A.2 R3.2 R4.1 U11.7 | length 23.5
  Top Layer w0.254: U11.7 127.601,67.525 128.078,68.002 R4.1 ; R3.2 128.166,69.804 128.166,68.005 R4.1 ; J2A.2 140.149,73.271 141.098,72.323 141.098,68.925 139.568,67.396 135.436,67.396 134.172,68.66 D11.2 D9.2 130.767,68.729 130.041,68.002 R4.1
NetD10_1: D10.1 D11.1 J2A.1 R4.2 R5.1 U11.6 | length 24.1
  Top Layer w0.254: U11.6 127.606,66.875 128.078,66.402 R4.2 ; R5.1 R4.2 ; J2A.1 141.502,72.363 141.502,68.758 139.736,66.992 135.449,66.992 134.172,65.714 D11.1 D10.1 130.767,65.676 130.041,66.402 R4.2
NetQ1_1: Q1.1 R7.2 U1.3 | length 6
  Top Layer w0.5: R7.2 Q1.1 U1.3
NetQ2_1: Q2.1 R9.2 U2.3 | length 6
  Top Layer w0.5: R9.2 Q2.1 U2.3
NetQ3_1: Q3.1 R11.2 U3.3 | length 6
  Top Layer w0.5: R11.2 Q3.1 U3.3
NetQ4_1: Q4.1 R16.2 U4.3 | length 6
  Top Layer w0.5: R16.2 Q4.1 U4.3
NetQ5_1: Q5.1 R18.2 U5.3 | length 6
  Top Layer w0.5: R18.2 72.331,44.331 U5.3
NetQ6_1: Q6.1 R20.2 U6.3 | length 6
  Top Layer w0.5: R20.2 Q6.1 U6.3@54.85,47.237
NetQ7_1: Q7.1 R22.2 U7.3 | length 6
  Top Layer w0.5: R22.2 Q7.1 U7.3@37.35,47.237
NetQ8_1: Q8.1 R24.2 U8.3 | length 6
  Top Layer w0.5: R24.2 Q8.1 U8.3@19.867,47.254
NetR6_2: R6.2 U1.1 | length 3
  Top Layer w0.5: U1.1 R6.2
NetR8_2: R8.2 U2.1 | length 3
  Top Layer w0.5: U2.1 R8.2
NetR10_2: R10.2 U3.1 | length 3
  Top Layer w0.5: U3.1 R10.2
NetR12_2: R12.2 U4.1 | length 3
  Top Layer w0.5: U4.1 R12.2
NetR13_2: R13.2 TX.1 | length 1.8
  Top Layer w0.254: R13.2 TX.1
NetR14_2: R14.2 RX.1 | length 1.8
  Top Layer w0.254: R14.2 RX.1
NetR17_2: R17.2 U5.1 | length 3
  Top Layer w0.5: U5.1 R17.2
NetR19_2: R19.2 U6.1 | length 3
  Top Layer w0.5: U6.1 R19.2
NetR21_2: R21.2 U7.1 | length 3
  Top Layer w0.5: U7.1 R21.2
NetR23_2: R23.2 U8.1 | length 3
  Top Layer w0.5: U8.1 R23.2
PDI/MOSI: J9.4 U12.15 | length 28.8
  Top Layer w0.254: J9.4 62.517,73.416 62.517,75.661 62.923,76.067 82.769,76.067 84.498,74.338 U12.15
PDO/MISO: J9.1 U12.16 | length 18.3
  Top Layer w0.254: J9.1 80.736,74.7 82.97,72.466 U12.16
PH1_1: J1.3 K1.11 | length 25.1
  Top Layer w1.95: J1.3 K1.11
  Bottom Layer w1.95: J1.3 K1.11
PH1_2: J1.2 K1.14 | length 20.2
  Top Layer w1.95: K1.14 137.981,12.922 140.481,10.422 J1.2
  Bottom Layer w1.95: K1.14 137.981,12.922 140.481,10.422 J1.2
PH1_3: J1.1 K1.12 | length 38.3
  Top Layer w1.95: J1.1 135.481,8.198 133.003,10.677 133.003,15 137.93,19.927 137.97,19.927 K1.12
  Bottom Layer w1.95: J1.1 135.481,8.198 133.003,10.677 133.003,15 137.93,19.927 137.97,19.927 K1.12
PH2_1: J2.3 K2.11 | length 25.1
  Top Layer w1.95: J2.3 K2.11
  Bottom Layer w1.95: J2.3 K2.11
PH2_2: J2.2 K2.14 | length 20.2
  Top Layer w1.95: K2.14 120.481,12.922 122.981,10.422 J2.2
  Bottom Layer w1.95: K2.14 120.481,12.922 122.981,10.422 J2.2
PH2_3: J2.1 K2.12 | length 38.3
  Top Layer w1.95: J2.1 117.981,8.198 115.503,10.677 115.503,15 120.43,19.927 120.47,19.927 K2.12
  Bottom Layer w1.95: J2.1 117.981,8.198 115.503,10.677 115.503,15 120.43,19.927 120.47,19.927 K2.12
PH3_1: J3.3 K3.11 | length 25.1
  Top Layer w1.95: J3.3 K3.11
  Bottom Layer w1.95: J3.3 K3.11
PH3_2: J3.2 K3.14 | length 20.2
  Top Layer w1.95: K3.14 102.981,12.922 105.481,10.422 J3.2
  Bottom Layer w1.95: K3.14 102.981,12.922 105.481,10.422 J3.2
PH3_3: J3.1 K3.12 | length 38.3
  Top Layer w1.95: J3.1 100.481,8.198 98.003,10.677 98.003,15 102.93,19.927 102.97,19.927 K3.12
  Bottom Layer w1.95: J3.1 100.481,8.198 98.003,10.677 98.003,15 102.93,19.927 102.97,19.927 K3.12
PH4_1: J4.3 K4.11 | length 25.1
  Top Layer w1.95: J4.3 K4.11
  Bottom Layer w1.95: J4.3 K4.11
PH4_2: J4.2 K4.14 | length 20.2
  Top Layer w1.95: K4.14 85.481,12.922 87.981,10.422 J4.2
  Bottom Layer w1.95: K4.14 85.481,12.922 87.981,10.422 J4.2
PH4_3: J4.1 K4.12 | length 38.3
  Top Layer w1.95: J4.1 82.981,8.198 80.503,10.677 80.503,15 85.43,19.927 85.47,19.927 K4.12
  Bottom Layer w1.95: J4.1 82.981,8.198 80.503,10.677 80.503,15 85.43,19.927 85.47,19.927 K4.12
PH5_1: J5.3 K5.11 | length 25.1
  Top Layer w1.95: J5.3 K5.11
  Bottom Layer w1.95: J5.3 K5.11
PH5_2: J5.2 K5.14 | length 20.2
  Top Layer w1.95: K5.14 67.981,12.922 70.481,10.422 J5.2
  Bottom Layer w1.95: K5.14 67.981,12.922 70.481,10.422 J5.2
PH5_3: J5.1 K5.12 | length 38.3
  Top Layer w1.95: J5.1 65.481,8.198 63.003,10.677 63.003,15 67.93,19.927 67.97,19.927 K5.12
  Bottom Layer w1.95: J5.1 65.481,8.198 63.003,10.677 63.003,15 67.93,19.927 67.97,19.927 K5.12
PH6_1: J6.3 K6.11 | length 25.1
  Top Layer w1.95: J6.3 K6.11
  Bottom Layer w1.95: J6.3 K6.11
PH6_2: J6.2 K6.14 | length 20.2
  Top Layer w1.95: K6.14 50.481,12.922 52.981,10.422 J6.2
  Bottom Layer w1.95: K6.14 50.481,12.922 52.981,10.422 J6.2
PH6_3: J6.1 K6.12 | length 38.3
  Top Layer w1.95: J6.1 47.981,8.198 45.503,10.677 45.503,15 50.43,19.927 50.47,19.927 K6.12
  Bottom Layer w1.95: J6.1 47.981,8.198 45.503,10.677 45.503,15 50.43,19.927 50.47,19.927 K6.12
PH7_1: J7.3 K7.11 | length 25.1
  Top Layer w1.95: J7.3 K7.11
  Bottom Layer w1.95: J7.3 K7.11
PH7_2: J7.2 K7.14 | length 20.2
  Top Layer w1.95: K7.14@32.981,12.922 35.481,10.422 J7.2
  Bottom Layer w1.95: K7.14@32.981,12.922 35.481,10.422 J7.2
PH7_3: J7.1 K7.12 | length 38.4
  Top Layer w1.95: J7.1 30.481,8.198 28.003,10.677 28.003,15.005 32.925,19.927 32.97,19.927 K7.12
  Bottom Layer w1.95: J7.1 30.481,8.198 28.003,10.677 28.003,15.015 32.915,19.927 32.97,19.927 K7.12
PH8_1: J8.3 K8.11 | length 25.1
  Top Layer w1.95: J8.3 K8.11
  Bottom Layer w1.95: J8.3 K8.11
PH8_2: J8.2 K8.14 | length 20.2
  Top Layer w1.95: K8.14 17.981,10.438 J8.2
  Bottom Layer w1.95: K8.14 17.981,10.438 J8.2
PH8_3: J8.1 K8.12 | length 38.3
  Top Layer w1.95: J8.1 12.981,8.198 10.503,10.677 10.503,15 15.43,19.927 15.47,19.927 K8.12
  Bottom Layer w1.95: J8.1 12.981,8.198 10.503,10.677 10.503,15 15.43,19.927 15.47,19.927 K8.12
R\E\S\E\T\: C8.1 J9.5 R2.2 RESET.1 U12.29 | length 38.6
  Top Layer w0.254: J9.5 59.669,73.135 59.669,69.967 65.436,64.2 C8.1 R2.2 71.53,64.2 72.204,63.526 RESET.1
  Top Layer w0.5: RESET.1 v1@75.742,63.526 ; U12.29 v1@86.898,66.268
  Bottom Layer w0.254: v1(75.742,63.502) 84.156,63.502 v1(86.922,66.268)
RX: RX.2 U11.1 U12.30 | length 43.3
  Top Layer w0.254: v1(96.868,64.936) 103.265,64.936 106.49,68.161 RX.2 119.283,68.168 121.889,68.168 U11.1
  Top Layer w0.5: v1@87.698,61.985 U12.30
  Bottom Layer w0.254: v1(87.675,61.985) 88.786,63.096 90.168,63.096 91.709,61.556 97.18,61.556 97.96,62.335 97.96,63.262 97.468,63.754 97.468,64.336 v1(96.868,64.936)
SCK: J9.3 U12.17 | length 20.5
  Top Layer w0.254: J9.3 65.106,73.367 80.769,73.367 82.328,71.808 U12.17
TX: TX.2 U11.4 U12.31 | length 38.2
  Top Layer w0.254: v1(96.868,62.996) 104.068,62.996 107.294,66.221 TX.2 119.278,66.223 121.894,66.223 U11.4
  Top Layer w0.5: U12.31 v1@88.498,66.268
  Bottom Layer w0.254: v1(88.522,66.268) 91.793,62.996 v1(96.868,62.996)
pads on no net: U9.3 U9.5 U9.8 U12.9 U12.10 U12.11 U12.12 U12.13 U12.14 U12.19 U12.22

## Polygon pours and split planes (outlines as drawn)
12V on Top Layer "12V_L01_P025" (solid, pour order 25): 13.413,75.496 18.468,75.496 18.668,75.296 18.668,72.296 19.168,71.796 19.168,57.896 17.124,55.851 6.905,55.851 6.268,56.488 6.268,57.996 6.981,58.709 15.681,58.709 16.417,59.445 16.417,65.85 12.922,69.346 12.922,75.005
GND on Top Layer "Top Layer-GND" (solid, remove dead copper, pour order 26): 19.068,75.196 19.068,72.196 19.768,71.496 19.768,58.096 18.068,56.396 18.068,54.596 18.675,53.989 145.562,53.989 147.368,55.796 147.368,74.696 145.568,76.496 11.668,76.496 8.768,76.496 7.468,75.196 7.468,69.796 5.768,68.096 5.768,60.238 7.012,58.994 15.826,58.994 16.168,59.337 16.168,65.796 13.268,68.696 13.268,75.296 13.668,75.696 18.568,75.696
3V3 on Top Layer "3V3_L01_P010" (solid, pour order 10): 22.668,69.751 23.034,70.117 24.231,70.117 24.768,69.579 24.768,66.896 24.968,66.696 25.768,66.696 26.168,66.296 26.168,63.096 24.568,61.496 23.268,61.496 22.668,62.096
GND_ISO on Top Layer "Top Layer-GND_ISO" (solid, pour order 22): 141.869,29.367 143.94,31.439 143.94,42.557 143.025,43.473 136.974,43.473 136.769,43.267 136.769,34.867 134.669,32.767 128.612,32.767 126.441,34.939 126.441,42.557 125.525,43.473 119.474,43.473 119.269,43.267 119.269,34.749 117.287,32.767 111.448,32.767 108.94,35.275 108.94,42.557 108.025,43.473 101.974,43.473 101.769,43.267 101.769,34.839 99.697,32.767 93.59,32.767 91.441,34.917 91.441,42.557 90.525,43.473 84.474,43.473 84.269,43.267 84.269,34.868 82.168,32.767 76.447,32.767 73.941,35.274 73.941,42.557 73.025,43.473 66.974,43.473 66.769,43.267 66.769,34.867 64.669,32.767 58.651,32.767 56.459,34.959 56.459,42.576 55.544,43.491 49.493,43.491 49.288,43.286 49.288,34.856 47.199,32.767 41.3,32.767 38.959,35.108 38.959,42.576 38.044,43.492 31.993,43.492 31.788,43.286 31.788,35.404 29.15,32.767 14.569,32.767 12.969,34.367 12.969,37.667 14.069,38.767 16.469,38.767 18.869,41.167 20.669,41.167 21.269,41.767 21.269,43.067 20.869,43.467 16.269,43.467 16.069,43.667 16.069,45.654 15.856,45.867 3.969,45.867 2.139,44.038 2.139,30.806 3.578,29.367
5V_ISO on Top Layer "Top Layer-5V_ISO" (solid, pour order 21): 13.469,34.567 14.769,33.267 29.057,33.267 30.898,35.109 33.792,35.109 34.488,35.804 34.488,37.404 31.288,40.604 31.288,47.104 32.841,48.657 38.2,48.657 38.488,48.37 38.488,45.904 38.888,45.504 41.11,45.504 41.37,45.764 41.37,47.168 42.806,48.604 45.432,48.604 46.988,47.048 46.988,37.607 49.486,35.109 51.292,35.109 51.988,35.804 51.988,37.404 48.788,40.604 48.788,47.104 50.341,48.657 55.756,48.657 55.988,48.426 55.988,45.904 56.388,45.504 58.61,45.504 58.87,45.764 58.87,47.168 60.306,48.604 62.832,48.604 64.469,46.967 64.469,37.57 66.967,35.072 68.773,35.072 69.469,35.767 69.469,37.367 66.269,40.567 66.269,47.067 67.806,48.604 73.247,48.604 73.469,48.383 73.469,45.867 73.869,45.467 76.091,45.467 76.351,45.727 76.351,47.149 77.806,48.604 80.232,48.604 81.969,46.867 81.969,37.57 84.467,35.072 86.273,35.072 86.969,35.767 86.969,37.367 83.769,40.567 83.769,47.067 85.306,48.604 90.781,48.604 90.969,48.416 90.969,45.867 91.369,45.467 93.591,45.467 93.851,45.727 93.851,47.449 95.006,48.604 97.932,48.604 99.469,47.067 99.469,37.57 101.967,35.072 103.773,35.072 104.469,35.767 104.469,37.367 101.269,40.567 101.269,47.067 102.806,48.604 108.311,48.604 108.469,48.446 108.469,45.867 108.869,45.467 111.091,45.467 111.351,45.727 111.351,47.449 112.506,48.604 115.532,48.604 116.969,47.167 116.969,37.57 119.467,35.072 121.273,35.072 121.969,35.767 121.969,37.367 118.769,40.567 118.769,47.067 120.306,48.604 125.804,48.604 125.969,48.44 125.969,45.867 126.369,45.467 128.591,45.467 128.851,45.727 128.851,47.851 129.604,48.604 133.032,48.604 134.469,47.167 134.469,37.57 136.967,35.072 138.773,35.072 139.469,35.767 139.469,37.367 136.269,40.567 136.269,47.067 137.806,48.604 143.22,48.604 143.469,48.356 143.469,45.867 143.869,45.467 146.091,45.467 146.351,45.727 146.351,48.803 145.787,49.367 144.487,50.667 11.969,50.667 10.796,51.84 3.041,51.84 2.169,50.967 2.169,46.967 3.087,46.049 18.151,46.049 18.369,46.267 18.369,48.289 18.737,48.657 20.805,48.658 21.072,48.39 21.072,45.941 21.285,45.727 28.782,45.727 29.488,45.022 29.488,36.52 28.035,35.067 19.569,35.067 16.269,38.367 14.369,38.367 13.469,37.467
GND on Bottom Layer "GND_L02_P027" (solid, remove dead copper, pour order 27): -0.032,76.996 158,76.996 158,53.896 -0.032,53.896
GND_ISO on Bottom Layer "GND_ISO_L02_P028" (solid, pour order 28): -0.032,48.396 158,48.396 158,38.333 -0.032,38.333

## Other copper
Top Layer:
  text "Notes" at 168.915,75.861 h1.27
  text "Surface Copper finish: HASL" at 168.915,72.284 h1.27
  text "Soldermask: Green" at 168.915,67.861 h1.27
  text "Silkscreen: White" at 168.915,63.861 h1.27

## Silkscreen, mask and mechanical layers (free items; w line width, h text height)
Top Overlay:
  lines w0.2: 2.1,51.35 157.3,51.35 ; 2.1,51.5 157.3,51.5 ; 2.1,51.65 157.3,51.65 ; 2.1,51.8 157.3,51.8 ; 2.1,51.9 157.3,51.9 ; 2.1,51.95 157.3,51.95 ; 2.1,52.1 157.3,52.1 ; 2.1,52.25 157.3,52.25 ; 2.1,52.4 157.3,52.4 ; 44.7,72.9 59.25,72.9 ; 49.5,70.65 49.5,75 ; 54.45,70.5 54.45,75
  lines w0.254: 32.045,65.945 33.064,67.473 ; 33.009,67.871 ccw(c33.755,67.871) 33.228,67.343 33.353,67.219 ccw(c33.849,67.715) 33.849,67.013 34.093,67.013 34.8,65.951 ; 33.148,68.507 33.49,69.031 ; 33.3,68.75 33.5,68.55 33.7,68.35 ; 33.493,65.813 33.493,67.013 ; 146.25,63.345 146.25,68.445 ; 148.978,63.26 148.978,68.36 ; 151.228,63.26 151.228,68.36 ; 153.928,63.26 153.928,68.36 ; 34.6,69.799 ccw(c35.2,69.799) 34.776,69.374 ccw(c35.8,70.399) 35.8,68.95 ; 34.6,69.799 cw(c34.6,68.467) 35.541,69.409 35.659,69.291 cw(c35.317,68.95) 35.8,68.95 ; 34.6,69.799 34,68.95 33.4,67.75 33.659,67.491 ccw(c34,67.833) 34,67.35 35.1,68.25 35.8,68.95 ; 35.8,68.95 ccw(c35.8,68.95) 35.8,68.95 ; 35.8,68.95 ccw(c35.8,68.95) 35.8,68.95 ; 1.35,17.35 1.35,34.6 9.9,34.6 9.9,17.35 1.35,17.35 ; 35.102,74.041 35.902,73.841 36.702,74.041 35.902,74.241 35.102,74.041 ; 35.7,74.05 35.9,73.25 36.1,74.05 35.9,74.85 35.7,74.05 ; 37.1,72.55 37.9,72.35 38.7,72.55 37.9,72.75 37.1,72.55 ; 37.698,72.559 37.898,71.759 38.098,72.559 37.898,73.359 37.698,72.559 ; 37.972,69.34 ccw(c38.7,72.25) 38.276,75.22 39.002,74.494 cw(c36.834,72.326) 39.9,72.326 cw(c37.345,72.326) 39.152,70.519 37.972,69.34 ; 41.945,74.411 42.745,74.611 43.545,74.411 42.745,74.211 41.945,74.411 ; 42.543,74.42 42.743,73.62 42.943,74.42 42.743,75.22 42.543,74.42
  text "MISO" at 55.154,73.604 h1.27
  text "RST" at 45.854,73.454 h1.27
  text "SCK" at 50.654,73.454 h1.27
  text "GND" at 45.554,71.204 h1.27
  text "MOSI" at 50.204,71.204 h1.27
  text "3V3" at 55.154,71.204 h1.27
  text "PROGRAMMING" at 55.904,68.804 h1.27
  text "RS485" at 137.954,68.504 h1.27
  text "Observator" at 36.154,67.304 h1.27
  text "12V" at 12.346,67.004 h1.27 r90
  text "GND" at 15.196,67.004 h1.27 r90
  text "B" at 153.196,64.799 h1.27 r90
  text "A" at 150.646,64.649 h1.27 r90
  text "GND" at 145.246,63.899 h1.27 r90
  text "GND" at 148.396,63.899 h1.27 r90
  text "GND" at 6.104,32.754 h1.27
  text "U9" at 2.054,32.454 h1.27
  text "VIN" at 6.55,30.683 h1.27
  text "NC" at 6.815,28.58 h1.27
  text "NC" at 6.854,24.654 h1.27
  text "5V_ISO" at 3.254,22.677 h1.27
  text "GND_ISO" at 1.8,19.45 h1.27
  text "NC" at 6.854,17.904 h1.27
Board:
  the board outline again, w0.254
Drill Drawing:
  drawing of 215 lines, arcs and shapes, not listed
  text "Layer" at 169.889,59.038 h1.52
  text "Name" at 178.734,59.038 h1.52
  text "Material" at 198.158,59.038 h1.52
  text "Thickness" at 214.984,59.038 h1.52
  text "Constant" at 228.038,59.038 h1.52
  text "Board Layer Stack" at 240.555,59.038 h1.52
  text "Top Overlay" at 178.734,55.99 h1.52
  text "Top Solder" at 178.734,52.942 h1.52
  text "Solder Resist" at 198.158,52.942 h1.52
  text "0.010mm" at 214.984,52.942 h1.52
  text "3.5" at 228.038,52.942 h1.52
  text "1" at 169.889,49.894 h1.52
  text "Top Layer" at 178.734,49.894 h1.52
  text "Copper" at 198.158,49.894 h1.52
  text "0.036mm" at 214.984,49.894 h1.52
  text "Dielectric 1" at 178.734,46.846 h1.52
  text "FR-4" at 198.158,46.846 h1.52
  text "1.500mm" at 214.984,46.846 h1.52
  text "4.8" at 228.038,46.846 h1.52
  text "2" at 169.889,43.798 h1.52
  text "Bottom Layer" at 178.734,43.798 h1.52
  text "Copper" at 198.158,43.798 h1.52
  text "0.036mm" at 214.984,43.798 h1.52
  text "Bottom Solder" at 178.734,40.75 h1.52
  text "Solder Resist" at 198.158,40.75 h1.52
  text "0.010mm" at 214.984,40.75 h1.52
  text "3.5" at 228.038,40.75 h1.52
  text "Bottom Overlay" at 178.734,37.702 h1.52
  text "Total board thickness:" at 169.889,34.654 h1.52
  text "1.591mm" at 214.984,34.654 h1.52
  text "Symbol" at 170.402,27.399 h1.83
  text "Count" at 182.024,27.399 h1.83
  text "Hole Size" at 194.396,27.399 h1.83
  text "Plated" at 219.726,27.399 h1.83
  text "Hole Type" at 229.807,27.399 h1.83
  text "Drill Layer Pair" at 244.773,27.399 h1.83
  text "Via/Pad" at 276.082,27.399 h1.83
  text "50" at 182.024,23.589 h1.52
  text "0.600mm (23.62mil)" at 194.396,23.589 h1.52
  text "PTH" at 219.726,23.589 h1.52
  text "Round" at 229.807,23.589 h1.52
  text "Top Layer - Bottom Layer" at 244.773,23.589 h1.52
  text "Via" at 276.082,23.589 h1.52
  text "2" at 182.024,19.779 h1.52
  text "0.700mm (27.56mil)" at 194.396,19.779 h1.52
  text "PTH" at 219.726,19.779 h1.52
  text "Round" at 229.807,19.779 h1.52
  text "Top Layer - Bottom Layer" at 244.773,19.779 h1.52
  text "Pad" at 276.082,19.779 h1.52
  text "7" at 182.024,15.969 h1.52
  text "1.000mm (39.37mil)" at 194.396,15.969 h1.52
  text "PTH" at 219.726,15.969 h1.52
  text "Round" at 229.807,15.969 h1.52
  text "Top Layer - Bottom Layer" at 244.773,15.969 h1.52
  text "Pad" at 276.082,15.969 h1.52
  text "6" at 182.024,12.159 h1.52
  text "1.100mm (43.31mil)" at 194.396,12.159 h1.52
  text "PTH" at 219.726,12.159 h1.52
  text "Round" at 229.807,12.159 h1.52
  text "Top Layer - Bottom Layer" at 244.773,12.159 h1.52
  text "Pad" at 276.082,12.159 h1.52
  text "70" at 182.024,8.349 h1.52
  text "1.300mm (51.18mil)" at 194.396,8.349 h1.52
  text "PTH" at 219.726,8.349 h1.52
  text "Round" at 229.807,8.349 h1.52
  text "Top Layer - Bottom Layer" at 244.773,8.349 h1.52
  text "Pad" at 276.082,8.349 h1.52
  text "4" at 182.024,4.539 h1.52
  text "3.200mm (125.98mil)" at 194.396,4.539 h1.52
  text "PTH" at 219.726,4.539 h1.52
  text "Round" at 229.807,4.539 h1.52
  text "Top Layer - Bottom Layer" at 244.773,4.539 h1.52
  text "Pad" at 276.082,4.539 h1.52
  text "139 Total" at 182.024,0.729 h1.52

## Dimensions
0,2 to 158,2 on Drill Drawing
156,77 to 156,0 on Drill Drawing